# Altium PCB bh_carrier_0_alph.PcbDoc (part 1 of 2)
Units mil, origin at the board's own origin, x right, y up, seen from the top; angles counter-clockwise.
Board outline 3937.01 x 2362.2 mil, 2 copper layers (Top Layer, Bottom Layer); 124 components, 129 nets, 514 pads, 195 vias.
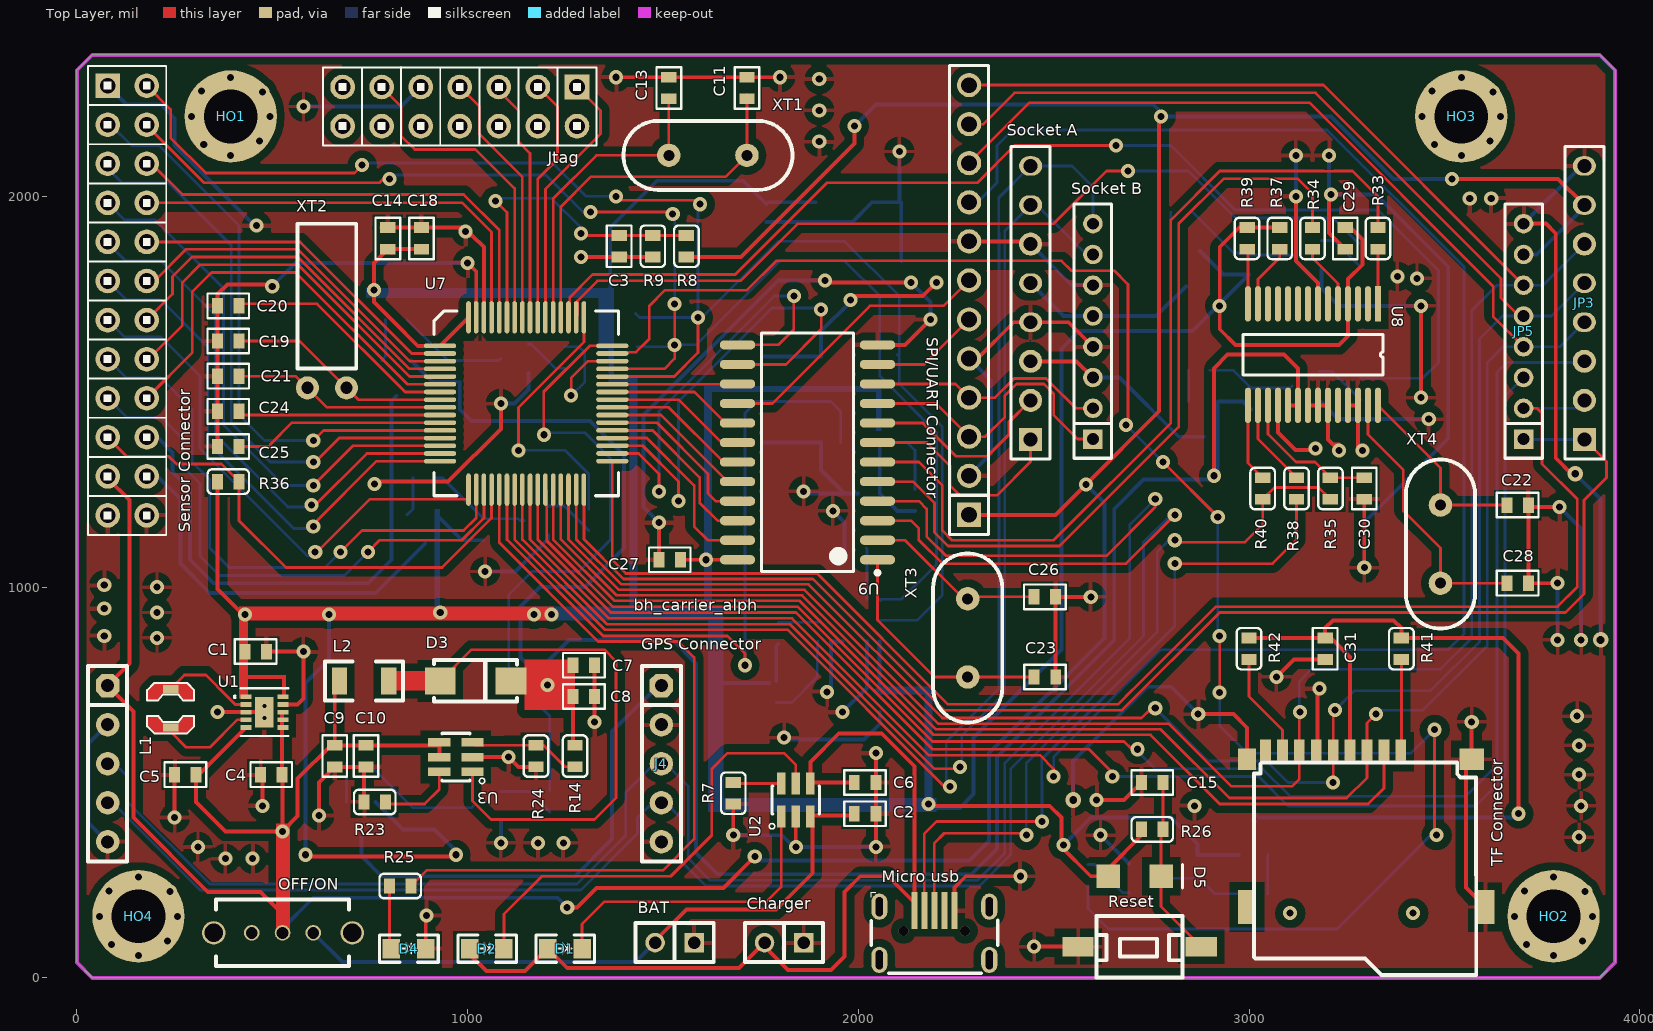
[diagram p0: Top Layer view]
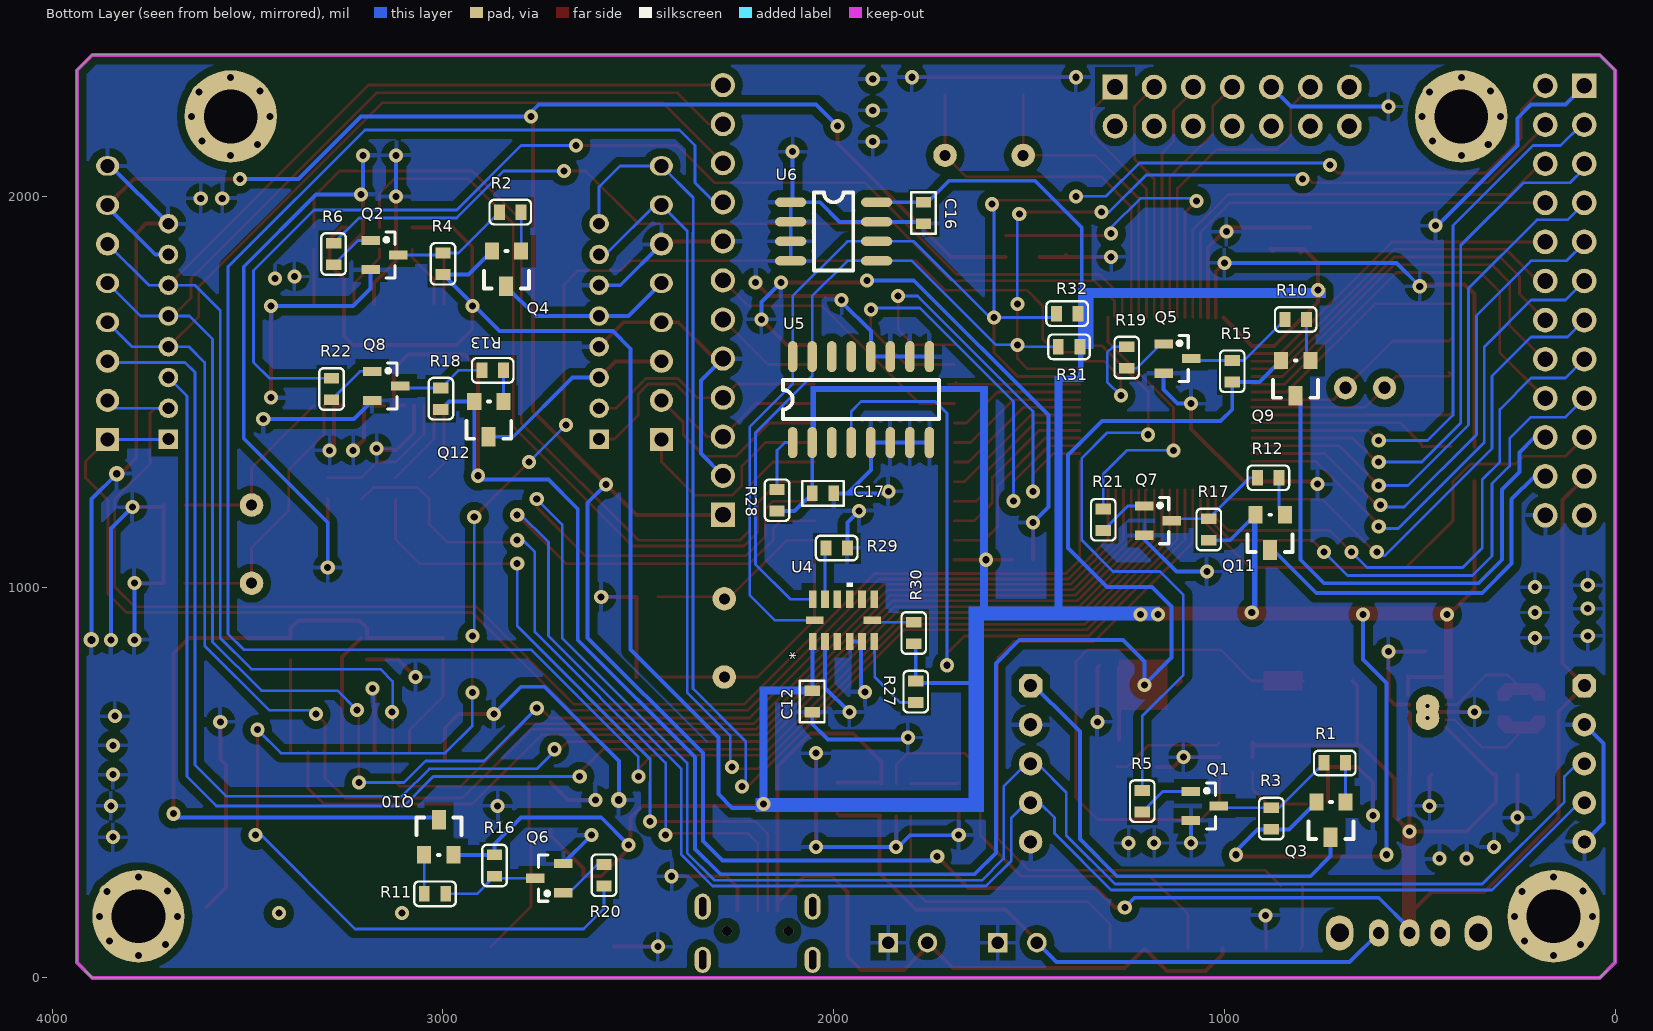
[diagram p1: Bottom Layer view, seen from below]

## Layer stack, top to bottom
Top Layer: signal copper 1.4
Dielectric: dielectric 12.6, FR-4, Dk 4.8
Bottom Layer: signal copper 1.4

## Board outline
0,2322.83 39.37,2362.2 3897.64,2362.2 3937.01,2322.83 3937.01,39.37 3897.64,0 39.37,0 0,39.37

## Design rules (kind name [scope] priority, off if disabled: settings)
Clearance Clearance_1 [(InPolygon)] p1: gap=20
Clearance [All] p2: gap=7
HoleSize [All] p1: absolutevalues=TRUE maxlimit=1000 minlimit=1 maxpercent=80.000 minpercent=20.000
MinimumSolderMaskSliver [All] p1 off: minsoldermaskwidth=10
PolygonConnect [All] p1: connectstyle=Relief reliefconductorwidth=10 reliefentries=4 polygonreliefangle="90 Angle"
RoutingVias [All] p1: holewidth=20 width=40 viastyle="Through Hole" minholewidth=15 minwidth=30 maxholewidth=20 maxwidth=40
ShortCircuit ShortCircuit_1 [HasFootPrint('HOLE1') OR  HasFootPrint('QFN-10') OR HasFootPrint('LPS3010')] p1: allowed=TRUE
ShortCircuit [All] p2: allowed=FALSE
SilkToSilkClearance [All] p1: silktosilkclearance=7
SilkscreenOverComponentPads [All] p1 off: minsilkscreentomaskgap=10
SolderMaskExpansion [All] p1: expansion=4
Width Width_2 [(OnLayer('Keep-Out Layer'))] p1: maxlimit=10 minlimit=10 preferedwidth=10
Width Width_1 [(InNet('VBUS') OR InNet('VCC_BASE_3.3V') OR InNet('VCC_BASE_5V') OR InNet('VCC_GPS_3.3V') OR InNet('VCC_SD_3.3V') OR InNet('VCC_SENSOR_3.3V') OR InNet('VCC_SENSOR_5V') OR InNet('VCC_SOCKET_3.3V') OR InNet('VCC_SOCKET_5V') OR InNet('VIN') OR InNet('V_BAT') OR InNet('GND') OR InNet('BAT'))] p2: maxlimit=10 minlimit=10 preferedwidth=10
Width [All] p3: maxlimit=7 minlimit=7 preferedwidth=7 minimp=50.000000 maximp=50.000000 favimp=50.000000
23 further rules are at their usual default settings.

## Components (designator, comment, footprint, x,y, rotation, side; value= is the part's Value field where it differs from the comment)
BAT "Battery Connector" SIP1X2X2.54 1580,90 r180 top (schematic designator J1)
C1 "10uf/6.3V" C0603 430,835 r0 top
C2 "10uF" C0603 2045,420 r180 top
C3 "0.1uf" C0603 1387.93,1900 r270 top
C4 "0.1uf" C0603 470,520 r0 top
C5 "4.7uf/6.3V" C0603 250,520 r0 top
C6 "1uF" C0603 2045,500 r180 top
C7 "22uF/16V" C0603 1270,800 r0 top
C8 "0.1uF" C0603 1270,720 r0 top
C9 "0.1uF" C0603 660,595 r270 top
C10 "10uF/6.3V" C0603 740,595 r270 top
C11 "22pf" C0603 1715,2305 r270 top
C12 "0.1uF" C0603 2055,735 r270 bottom
C13 "22pf" C0603 1515,2305 r270 top
C14 "0.1uf" C0603 795.83,1865 r90 top
C15 "0.1uf" C0603 2780,500 r180 top
C16 "0.1uF" C0603 1770,1985 r270 bottom
C17 "0.1uF" C0603 2055,1240 r180 bottom
C18 "0.1uf" C0603 881.87,1865 r90 top
C19 "22pf" C0603 360,1630 r0 top
C20 "0.1uf" C0603 360,1720 r0 top
C21 "22pf" C0603 360,1540 r0 top
C22 "22pf" C0603 3660,1210 r0 top
C23 "22pf" C0603 2450,770 r0 top
C24 "0.1uf" C0603 415.12,1449.99 r180 top
C25 "0.1uf" C0603 415.12,1359.99 r180 top
C26 "22pf" C0603 2505,975 r180 top
C27 "0.1uF" C0603 1490,1070 r0 top
C28 "22pf" C0603 3660,1010 r0 top
C29 "0.1uf" C0603 3246.26,1920.12 r270 top
C30 "0.1u" C0603 3295,1225 r90 top
C31 "0.1uf" C0603 3194.99,814.88 r90 top
Charger "Solar Connetcor" SIP1X2X2.54 1860,90 r180 top (schematic designator J2)
D1 "LED-RED" D0805 1205,75 r0 top
D2 "LED-GREEN" D0805 1005,75 r0 top
D3 "SM340A" DO-214 930,760 r0 top
D4 "LED-GREEN" D0805 805,75 r0 top
D5 "DIODE" D1206 2640,260 r0 top
"GPS Connector" "GPS_Socket-B" SIP1X5X2.54 78.74,748.03 r270 top locked (schematic designator J5)
HO1 "HOL" HOLE1 393.7,2204.72 r0 top locked
HO2 "HOL" HOLE1 3779.53,157.48 r0 top locked
HO3 "HOL" HOLE1 3543.31,2204.72 r0 top locked
HO4 "HOL" HOLE1 157.48,157.48 r0 top locked
J4 "GPS_Socket-A" SIP1X5X2.54 1496.06,748.03 r270 top locked
JP3 "Socket0-B" SIP1x8x2.54 3858.27,1377.95 r90 top locked
JP5 "Socket1B" SIP1x8x2.0 3700.79,1377.95 r90 top locked
Jtag "JTAG" SIP2X7X2.54 1280,2280 r180 top (schematic designator P2)
L1 "1.5uH" LPS3010 240,690 r270 top
L2 "INDUCTOR" L1206 735,760 r0 top
"Micro usb" "USB" MicroUSB_four 2105,180 r0 top (schematic designator P1)
OFF/ON "SD12D07VG3" SW-1-2 605,115 r270 top (schematic designator S1)
Q1 "9013" SOT-23 1050.24,439.76 r180 bottom
Q2 "9013" SOT-23 3150,1850 r180 bottom
Q3 "RTR020P02" TSMT3 690,450 r0 bottom
Q4 "RTR020P02" TSMT3 2800.24,1859.76 r0 bottom
Q5 "9013" SOT-23 1120,1585 r180 bottom
Q6 "9013" SOT-23 2728,255 r0 bottom
Q7 "9013" SOT-23 1170,1170 r180 bottom
Q8 "9013" SOT-23 3145.24,1514.76 r180 bottom
Q9 "RTR020P02" TSMT3 780.24,1579.76 r0 bottom
Q10 "RTR020P02" TSMT3 3048,315 r180 bottom
Q11 "RTR020P02" TSMT3 845.43,1185 r0 bottom
Q12 "RTR020P02" TSMT3 2845.24,1474.76 r0 bottom
R1 "10k" R0603 690,550 r0 bottom
R2 "10k" R0603 2800.24,1959.76 r0 bottom
R3 "100k" R0603 880,380 r90 bottom
R4 "100k" R0603 3000,1800 r90 bottom
R5 "1k" R0603 1210.24,479.76 r270 bottom
R6 "1k" R0603 3280,1880 r270 bottom
R7 "1.66k 1%" R0603 1680,445 r90 top
R8 "1M  1%" R0603 1560,1900 r270 top
R9 "1M 1%" R0603 1473.96,1900 r270 top
R10 "10k" R0603 790,1685 r0 bottom
R11 "10k" R0603 3048,215 r180 bottom
R12 "10k" R0603 860,1280 r0 bottom
R13 "10k" R0603 2845.24,1554.76 r0 bottom
R14 "110k" R0603 1275,540 r90 top
R15 "100k" R0603 980,1525 r90 bottom
R16 "100k" R0603 2868,315 r270 bottom
R17 "100k" R0603 1040,1120 r90 bottom
R18 "100k" R0603 3005.24,1454.76 r90 bottom
R19 "1k" R0603 1250,1615 r270 bottom
R20 "1k" R0603 2588,235 r90 bottom
R21 "1k" R0603 1310,1200 r270 bottom
R22 "1k" R0603 3285.24,1534.76 r270 bottom
R23 "18k" R0603 735,450 r0 top
R24 "15k" R0603 1175,540 r90 top
R25 "1k" R0603 800,235 r0 top
R26 "4.7k" R0603 2780,380 r180 top
R27 "0" R0603 1790,760 r270 bottom
R28 "10k" R0603 2145,1250 r270 bottom
R29 "0" R0603 2020,1100 r180 bottom
R30 "10k" R0603 1795,855 r90 bottom
R31 "10k" R0603 1425,1615 r180 bottom
R32 "10k" R0603 1430,1700 r180 bottom
R33 "100" R0603 3330,1865 r90 top
R34 "100" R0603 3162.5,1865 r90 top
R35 "2k" R0603 3208.33,1225 r90 top
R36 "4.7K" R0603 360,1270 r0 top
R37 "10k" R0603 3078.75,1865 r90 top
R38 "51" R0603 3121.66,1225 r90 top
R39 "10k" R0603 2995,1865 r90 top
R40 "51" R0603 3035,1225 r90 top
R41 "10k" R0603 3390,870 r270 top
R42 "10k" R0603 3000,870 r270 top
Reset "KEY" KEY_2Pin 2720,80 r0 top (schematic designator K1)
"Sensor Connector" "Sensor Connector" SIP2X12X2.54 78.74,2283.46 r270 top locked (schematic designator JP1)
"Socket A" "Socket0-A" SIP1x8x2.54 2440.94,1377.95 r90 top locked (schematic designator JP2)
"Socket B" "Socket1-A" SIP1x8x2.0 2598.43,1377.95 r90 top locked (schematic designator JP4)
"SPI/UART Connector" "SPI/UART Connector" SIP1x12x2.54 2283.46,1184.96 r90 top locked (schematic designator JP6)
"TF Connector" "microSD" TF_CARD 3300,380 r270 top locked (schematic designator SD1)
U1 "TPS63031" QFN-10 480,680 r0 top
U2 "TP4057" SOT23-6 1840,455 r180 top
U3 "FP6291" SOT23-6 970,565 r270 top
U4 "ADXL345" LGA-CC-14-1 1975,915 r90 bottom
U5 "DS3231S" SO-16 2105,1370 r90 bottom
U6 "AT24C16" SO-8 2110,1985 r180 bottom
U7 "MSP430F149" LQFP64_M 1150,1470 r0 top
U8 "PL2303" SOP28 3380,2350 r270 top
U9 "GM8125-SSO" SOP-24 1870,1345 r180 top
XT1 "8M" HC-49S 1715,2105 r180 top
XT2 "32.768K" AT308 590,1510 r270 top
XT3 "12M" HC-49S 2280,970 r270 top
XT4 "12MHz" HC-49S 3490,1010 r90 top

## Footprints (in the part's own frame and the unit in brackets; to place one, negate y for a bottom-side part, rotate by r counter-clockwise, add the part's x,y. Pads: shape width x height; smd on the part's side, far side on the other; paste and mask are expansions set on the pad)
AT308 [mm] "XT32748"
  round 1.5 hole 0.8: 1(0,0) 2(0,2.54)
  silkscreen extent -10.67,-0.64 -1.27,3.17, body extent -10.19,-0.55 0.59,2.9, height 3.12
C0603 [mm]
  rect 0.7x1 smd: 1(0,0) 2(1.4,0)
  silkscreen extent -0.65,-0.8 2.05,0.8, body extent -0.09,-0.38 1.51,0.42, height 0.3
D0805 [mil]
  rect 45x50 smd: A(0,0) K(88,0)
  silkscreen extent -30,-35 120,35, body extent 7,-20 88,16, height 33
D1206 [mil]
  rect 60x60 smd: 1(135,0) 2(0,0)
  silkscreen extent 190,-30 190,30
DO-214 [mm]
  rect 2x1.75 smd: 1(0,0) 2(4.6,0)
  silkscreen extent -0.4,-1.35 5,1.35, body extent -0.2,-1.34 4.91,1.33, height 2.12
HC-49S [mil]
  round 60 hole 28: 1(0,0) 2(200,0)
  silkscreen extent -116,-88 316,89, body extent -123,-92 329,92, height 138
HOLE1 [mm]
  round 6 hole 3.5: 0(0,0)
KEY_2Pin [mil]
  rect 80x50 smd: 1(-157.48,0) 2(157.48,0)
  silkscreen extent -110,-79 110,79
L1206 [mm] "Chip Resistor, 2-Leads, Body 3.2x1.6mm, IPC Medium Density"
  rect 1x1.75 smd: 1(-1.6,0) 2(1.6,0)
  silkscreen extent -2.54,-1.27 2.54,1.27, body extent -1.65,-0.8 1.65,0.8, height 0.6
LGA-CC-14-1 [mm]
  rect 1.118x0.5 smd mask+0.025: 1(-1.371,2) 2(-1.371,1.2) 3(-1.371,0.4) 4(-1.371,-0.4) 5(-1.371,-1.2) 6(-1.371,-2) 8(1.371,-2) 9(1.371,-1.2) 10(1.371,-0.4) 11(1.371,0.4) 12(1.371,1.2) 13(1.371,2)
  rect 0.5x1.118 smd mask+0.025: 7(0,-1.871) 14(0,1.871)
  silkscreen extent 2.18,-0.59 2.44,-0.21
LPS3010 [mm]
  rect 0.5x1 smd mask+0: 1(-1.255,0.002) 2(1.255,-0.002)
  Top Layer region: 1.179,-1.526 0.493,-1.526 0.493,-0.84 0.874,-0.535 0.874,0.531 0.493,0.836 0.493,1.522 1.179,1.522 1.636,1.065 1.636,-1.069
  Top Layer region: -1.179,1.526 -0.493,1.526 -0.493,0.84 -0.874,0.535 -0.874,-0.531 -0.493,-0.836 -0.493,-1.522 -1.179,-1.522 -1.636,-1.065 -1.636,1.069
  silkscreen extent -1.64,-1.53 1.64,1.53, body extent -1.59,-1.61 1.56,1.55, height 1
LQFP64_M [mm] "作者：王千会"
  oval 2.1x0.3 smd: 1(-5.6,3.75) 2(-5.6,3.25) 3(-5.6,2.75) 4(-5.6,2.25) 5(-5.6,1.75) 6(-5.6,1.25) 7(-5.6,0.75) 8(-5.6,0.25) 9(-5.6,-0.25) 10(-5.6,-0.75) 11(-5.6,-1.25) 12(-5.6,-1.75) 13(-5.6,-2.25) 14(-5.6,-2.75) 15(-5.6,-3.25) 16(-5.6,-3.75) 33(5.6,-3.75) 34(5.6,-3.25) 35(5.6,-2.75) 36(5.6,-2.25) 37(5.6,-1.75) 38(5.6,-1.25) 39(5.6,-0.75) 40(5.6,-0.25) 41(5.6,0.25) 42(5.6,0.75) 43(5.6,1.25) 44(5.6,1.75) 45(5.6,2.25) 46(5.6,2.75) 47(5.6,3.25) 48(5.6,3.75)
  oval 0.3x2.1 smd: 17(-3.75,-5.6) 18(-3.25,-5.6) 19(-2.75,-5.6) 20(-2.25,-5.6) 21(-1.75,-5.6) 22(-1.25,-5.6) 23(-0.75,-5.6) 24(-0.25,-5.6) 25(0.25,-5.6) 26(0.75,-5.6) 27(1.25,-5.6) 28(1.75,-5.6) 29(2.25,-5.6) 30(2.75,-5.6) 31(3.25,-5.6) 32(3.75,-5.6) 49(3.75,5.6) 50(3.25,5.6) 51(2.75,5.6) 52(2.25,5.6) 53(1.75,5.6) 54(1.25,5.6) 55(0.75,5.6) 56(0.25,5.6) 57(-0.25,5.6) 58(-0.75,5.6) 59(-1.25,5.6) 60(-1.75,5.6) 61(-2.25,5.6) 62(-2.75,5.6) 63(-3.25,5.6) 64(-3.75,5.6)
  silkscreen extent -6,-6 6,6, body extent -6.07,-6.07 6.07,6.07, height 1.63
MicroUSB_four [mm]
  rect 0.4x2.4 smd: 1(0.976,-0.2) 2(1.626,-0.2) 3(2.276,-0.2) 4(3.576,-0.2) NC(2.926,-0.2)
  oval 1.05x1.7 hole 0.45 slot 1.25 at 90 deg: ""(-1.299,-3.4) ""(-1.299,0.05) ""(5.851,-3.4) ""(5.851,0.05)
  round 0.65 hole 0.65: ""(0.276,-1.525) ""(4.276,-1.525)
  silkscreen extent -1.82,-4.28 6.4,0.99, body extent -1.82,-4.94 6.38,0.99, height 2.69
QFN-10 [mm] "DSK10_2X1P2T"
  rect 0.704x0.3 smd paste-0.15: 1(-1.202,1) 2(-1.202,0.5) 3(-1.202,0) 4(-1.202,-0.5) 5(-1.202,-1) 6(1.202,-1) 7(1.202,-0.5) 8(1.202,0) 9(1.202,0.5) 10(1.202,1)
  rect 1.2x2 smd paste-0.987 mask-0.987: 11(0,0)
  round 0.508 / inner round 1.524 / far side round 1.524 hole 0.254: V(0,-0.394) V_2(0,0.394)
  Top Layer region: 0,-1 0,-1 0,-1 0,-1 0,-1 0,-1 0,-1 0,-1
  Top Layer region: 0,1 0,1 0,1 0,1 0,1 0,1 0,1 0,1
  silkscreen extent -1.98,-1.55 1.55,1.55
R0603 [mm]
  rect 0.7x1 smd: 1(0,0) 2(1.4,0)
  silkscreen extent -0.65,-0.8 2.05,0.8, body extent -0.1,-0.4 1.5,0.4, height 0.3
SIP1X2X2.54 [mil]
  rect 50x50 hole 32: 1(0,0)
  round 50 hole 32: 2(100,0)
  silkscreen extent -50,-50 150,50, body extent -52,-52 148,48, height 340
SIP1X5X2.54 [mil]
  oct 60x60 hole 33: 1(0,0)
  round 60 hole 33: 2(100,0) 3(200,0) 4(300,0) 5(400,0)
  silkscreen extent -50,-50 450,50
SIP1x8x2.0 [mil]
  rect 50x50 hole 30: 1(1,-2)
  round 50 hole 30: 2(79.74,-2) 3(158.48,-2) 4(237.22,-2) 5(315.96,-2) 6(394.7,-2) 7(473.44,-2) 8(552.18,-2)
  silkscreen extent -48,-50 602,46
SIP1x8x2.54 [mm] "Connector; Header; 8 Position"
  rect 1.5x1.5 hole 0.9: 1(0,0)
  round 1.5 hole 0.9: 2(2.54,0) 3(5.08,0) 6(12.7,0)
  oval 1.27x1.5 hole 0.9: 4(7.62,0) 5(10.16,0) 7(15.24,0) 8(17.78,0)
  silkscreen extent -1.27,-1.27 19.05,1.27, body extent -1.27,-1.27 19.05,1.27, height 0.7
SIP1x12x2.54 [mil]
  rect 62x62 hole 40: 1(0,0)
  round 62 hole 40: 2(100,0) 3(200,0) 4(300,0) 5(400,0) 6(500,0) 7(600,0) 8(700,0) 9(800,0) 10(900,0) 11(1000,0) 12(1100,0)
  silkscreen extent -50,-50 1150,50
SIP2X7X2.54 [mil]
  rect 63x63 hole 40: 1(0,0)
  round 63 hole 40: 2(0,100) 3(100,0) 4(100,100) 5(200,0) 6(200,100) 7(300,0) 8(300,100) 9(400,0) 10(400,100) 11(500,0) 12(500,100) 13(600,0) 14(600,100)
  silkscreen extent -50,-51 650,150, body extent -51,-52 648,150, height 340
SIP2X12X2.54 [mil]
  rect 63x63 hole 40: 1(0,0)
  round 63 hole 40: 2(0,100) 3(100,0) 4(100,100) 5(200,0) 6(200,100) 7(300,0) 8(300,100) 9(400,0) 10(400,100) 11(500,0) 12(500,100) 13(600,0) 14(600,100) 15(700,0) 16(700,100) 17(800,0) 18(800,100) 19(900,0) 20(900,100) 21(1000,0) 22(1000,100) 23(1100,0) 24(1100,100)
  silkscreen extent -50,-50 1150,150, body extent -51,-52 1148,150, height 340
SO-8 [mil]
  oval 80x24 smd: 1(0,0) 2(0,-50) 3(0,-100) 4(0,-150) 5(220,-150) 6(220,-100) 7(220,-50) 8(220,0)
  silkscreen extent 60,-175 160,25, body extent -9,-171 229,21, height 67
SO-16 [mil]
  oval 80x24 smd: 1(0,0) 2(0,-50) 3(0,-100) 4(0,-150) 5(0,-200) 6(0,-250) 7(0,-300) 8(0,-350) 9(220,-350) 10(220,-300) 11(220,-250) 12(220,-200) 13(220,-150) 14(220,-100) 15(220,-50) 16(220,0)
  silkscreen extent 60,-375 160,25, body extent -4,-368 224,18, height 69
SOP28 [mm] "PL2303"
  rect 2.3x0.38 smd: 1(15.875,-1.27)
  oval 2.3x0.38 smd: 2(15.875,-1.92) 3(15.875,-2.57) 4(15.875,-3.22) 5(15.875,-3.87) 6(15.875,-4.52) 7(15.875,-5.17) 8(15.875,-5.82) 9(15.875,-6.47) 10(15.875,-7.12) 11(15.875,-7.77) 12(15.875,-8.42) 13(15.875,-9.07) 14(15.875,-9.72) 15(22.475,-9.72) 16(22.475,-9.07) 17(22.475,-8.42) 18(22.475,-7.77) 19(22.475,-7.12) 20(22.475,-6.47) 21(22.475,-5.82) 22(22.475,-5.17) 23(22.475,-4.52) 24(22.475,-3.87) 25(22.475,-3.22) 26(22.475,-2.57) 27(22.475,-1.92) 28(22.475,-1.27)
  silkscreen extent 17.86,-10.05 20.49,-0.95, body extent 17.86,-10.05 20.49,-0.94, height 0.08
SOP-24 [mm] "SOP, 24-Leads, Body 15.5x7.6mm (max), Pitch 1.27mm, IPC Medium Density"
  oval 2.3x0.6 smd: 1(-4.55,6.985) 2(-4.55,5.715) 3(-4.55,4.445) 4(-4.55,3.175) 5(-4.55,1.905) 6(-4.55,0.635) 7(-4.55,-0.635) 8(-4.55,-1.905) 9(-4.55,-3.175) 10(-4.55,-4.445) 11(-4.55,-5.715) 12(-4.55,-6.985) 13(4.55,-6.985) 14(4.55,-5.715) 15(4.55,-4.445) 16(4.55,-3.175) 17(4.55,-1.905) 18(4.55,-0.635) 19(4.55,0.635) 20(4.55,1.905) 21(4.55,3.175) 22(4.55,4.445) 23(4.55,5.715) 24(4.55,6.985)
  silkscreen extent -4.68,-7.75 3,7.96, body extent -3.8,-7.75 3.8,7.75, height 2.65
SOT23-6 [mm] "SOT-23/SC-74A; 5 Leads; Body 3.1 x 3 mm, inc. leads (LxW max)"
  rect 0.55x1.45 smd: 1(0.95,1.075) 2(0,1.075) 3(-0.95,1.075) 4(-0.95,-1.075) 5(0,-1.075) 6(0.95,-1.075)
  silkscreen extent -1.55,-0.9 1.72,1.88, body extent -1.4,-1.19 1.4,1.23, height 1.08
SOT-23 [mm] "SOT23, 3-Leads, Body 2.9x1.3mm, Pitch 0.95mm, Lead Span 2.5mm, IPC High Density"
  rect 1.2x0.6 smd: 1(-0.9,0.95) 2(-0.9,-0.95) 3(0.9,0)
  silkscreen extent 0,-1.5 0.7,1.5, body extent -0.7,-1.5 0.7,1.5, height 1.1
SW-1-2 [mil]
  round 60 / inner round 60 / far side oval 90x70 hole 47.24: 0(0,100) 0(0,-255)
  round 40 / inner round 40 / far side oval 70x50 hole 30.62: 1(0,0) 2(0,-78.74) 3(0,-157.48)
  silkscreen extent -85,-249 85,91
TF_CARD [mm]
  rect 2.2x1.2 smd: 0(5.05,-7.75) 11(5.05,7.75)
  rect 1.6x0.7 smd: 1(-5.05,2.25) 2(-5.05,1.15) 3(-5.05,0.05) 4(-5.05,-1.05) 5(-5.05,-2.15) 6(-5.05,-3.25) 7(-5.05,-4.35) 8(-5.05,-5.45) 9(-5.05,-6.55)
  rect 1.4x1.2 smd: 10(-4.55,-7.75)
  rect 1.4x1.6 smd: 12(-4.55,6.85)
  silkscreen extent -4.35,-7.29 9.47,7.15
TSMT3 [mil]
  rect 36x44 smd: 1(-0.24,-0.24) 2(74.76,-0.24)
  rect 36x50 smd: 3(38,90)
  silkscreen extent -20,0 95,95, body extent -24,15 99,69, height 43

## Part data
BAT Charger: library part SIP1X2, "Connector"
C1 C2 C3 C4 C5 C6 C7 C8 C9 C10 C11 C12 C13 C14 C15 C16 C17 C18 C19 C20 C21 C22 C23 C24 C25 C26 C27 C28 C29 C30 C31: library part CAP-SMD, "SMD-CAP"
D1 D2 D4: library part LED
D3: library part "DIODE SCHOTTKY", "Schottky Diode"
D5: "Diode"
"GPS Connector" J4: library part SIP1X5, "Connector"
HO1 HO2 HO3 HO4: library part Antenna, "Generic Antenna"
JP3 JP5 "Socket A" "Socket B": library part SIP1X8, "8 Pin Header"
Jtag: library part "Header 7X2", "Header, 7-Pin, Dual row"
L1: library part L1, "LPS3015-152"
L2: "Inductor"
OFF/ON: library part SW-SPDT
Q1 Q2 Q5 Q6 Q7 Q8: library part NPN, "NPN Transistor"
Q3 Q4 Q9 Q10 Q11 Q12: library part "MOSFET P"
R1 R2 R3 R4 R5 R6 R7 R8 R9 R10 R11 R12 R13 R14 R15 R16 R17 R18 R19 R20 R21 R22 R23 R24 R25 R26 R27 R28 R29 R30 R31 R32 R33 R34 R35 R36 R37 R38 R39 R40 R41 R42: library part RES, "Resistor"
"Sensor Connector": library part SIP2X12
"SPI/UART Connector": library part SIP1X12, "12 Pin Header"
U1: library part TPS63031_2
U2: library part PT4057
U5: library part DS3231
U9: library part GM8125
XT1 XT2 XT3 XT4: library part XT, "晶振"

## Via types
v1: diameter 36, hole 18, Top Layer to Bottom Layer, 192 vias
v2: diameter 40, hole 20, Top Layer to Bottom Layer, 3 vias

## Nets (pads, with @x,y where several pads share a name; then routed paths per layer and width w, separated by ;. In a path a pad name is that pad's centre, name@x,y a point inside that pad or via, vN(x,y) a via of type N, cw(c..) or ccw(c..) an arc to the next point about the centre after c; other vN are vias at no path point)
AD0: C3.1 R8.1 R9.1 U7.59 | length 887.9
  Top Layer w7: v1(1071.75,1988.25) 1100.79,1959.21 U7.59@1100.79,1690.47 ; v1(1290,1905) 1295,1900 1447.93,1900 ; C3.1@1387.93,1900 R9.1@1473.96,1900 R8.1@1560,1900
  Bottom Layer w7: v1@1075,1995 1215,1995 v1@1290,1920
AD1: "Sensor Connector.6" U7.60 | length 1196
  Top Layer w7: 178.74,2083.46 191.54,2083.46 270,2005 990,2005 1081.1,1913.9 U7.60@1081.1,1690.47
AD2: "Sensor Connector.8" U7.61 | length 1131.8
  Top Layer w7: 178.74,1983.46 986.54,1983.46 1061.42,1908.58 U7.61@1061.42,1690.47
AD3: "Sensor Connector.10" U7.2 | length 869.1
  Top Layer w7: 178.74,1883.46 571.54,1883.46 857.05,1597.95 U7.2@929.53,1597.95
AD4: "Sensor Connector.12" U7.3 | length 903.3
  Top Layer w7: 178.74,1783.46 198.46,1783.46 280,1865 565,1865 851.73,1578.27 U7.3@929.53,1578.27
AD5: "Sensor Connector.14" U7.4 | length 962.9
  Top Layer w7: 178.74,1683.46 245,1749.72 245,1795 295,1845 565.2,1845 851.62,1558.58 U7.4@929.53,1558.58
AD6: "Sensor Connector.16" U7.5 | length 1059.1
  Top Layer w7: 178.74,1608.74 178.74,1583.46 183.46,1583.46 270,1670 270,1780 315,1825 565.4,1825 851.5,1538.9 U7.5@929.53,1538.9
AD7: "Sensor Connector.18" U7.6 | length 1093.3
  Top Layer w7: 178.74,1483.46 295,1599.72 295,1755 345,1805 560,1805 845.79,1519.21 U7.6@929.53,1519.21
BAT: BAT.2 C2.2 OFF/ON.1 U2.3 | length 1679.3
  Top Layer w10: BAT.2@1480,105 1480,95 1560,175 1790,175 1882.6,267.6 1882.6,370 ; 1882.6,362.4 1882.6,370 ; C2.2@1989.88,420 1984.88,415 1879.72,415 1882.6,412.13 1882.6,370
  Bottom Layer w10: OFF/ON.1@605,115 680,40 1430,40 BAT.2@1480,90
DATA+: "Micro usb.3" R35.1 R40.1 | length 1859.7
  Top Layer w7: 2194.59,172.13 2194.59,344.59 2220,370 2420,370 v1@2430,360 ; v1(2810,1120) 2815,1115 2990,1115 3035,1160 R40.1@3035,1225 3065,1255 3178.33,1255 R35.1@3208.33,1225
  Bottom Layer w7: v1@2430,350 2430,550 2765,885 2765,1090 v1@2800,1125
  other v1: 2430,365
DATA-: "Micro usb.2" R38.1 | length 1751.8
  Top Layer w7: 2169,172.13 2169,369 2200,400 v1(2470,400) ; v1(2810,1060) 3060,1060 3121.66,1121.66 R38.1@3121.66,1225
  Bottom Layer w7: 2469.5,501.87 2469.5,559.5 2810,900 v1(2810,1060) ; v1(2470,400) 2470,501.37
EX_RXD1: "GPS Connector.3" J4.3 U9.4 | length 4913.8
  Top Layer w7: U9.4@2049.13,1220 2155,1220 2175,1200 2175,1130 2225,1080 2635,1080 2760,1205 v1(2760,1225)
  Bottom Layer w7: 78.74,555 90,555 130,515 130,450 340,240 510,240 ; 500,240 510,240 ; J4.3@1496.06,548.03 1478.03,548.03 1405,475 1405,365 1280,240 510,240 ; J4.3@1496.06,571.06 1483.94,571.06 1565,490 1565,305 1620.5,249.5 2304.5,249.5 2375,320 2375,550 2695,870 2695,1160 2750,1215 2760,1215 v1(2760,1225)
EX_RXD2: "Socket B.2" "SPI/UART Connector.4" U9.10 | length 617.7
  Top Layer w7: U9.10@2049.13,1520 2248.43,1520 2283.46,1484.96 2350.17,1484.96 2399.2,1534 2480.8,1534 2492.4,1522.4 2557.11,1457.69 2600.43,1457.69
EX_RXD3: R33.2 U9.6 | length 2234.3
  Top Layer w7: U9.6@2049.13,1320 2155,1320 2215,1260 2215,1145 2240,1120 2500,1120 2800,1420 2800,1940 2925,2065 3191.87,2065 3192.37,2064.5 3217.63,2064.5 3218.13,2065 3265,2065 3330,2000 R33.2@3330,1920.12
EX_RXD4: "Socket A.2" U9.8 | length 505
  Top Layer w7: U9.8@2049.13,1420 2165,1420 2250,1335 2330,1335 2385,1390 2385,1422.01 2440.95,1477.95
EX_RXD5: "SPI/UART Connector.7" U9.16 | length 723.1
  Top Layer w7: U9.16@1690.87,1470 1780,1470 2030,1720 2218.5,1720 2283.46,1784.96
EX_SPI_CS: "SPI/UART Connector.9" U7.25 | length 5445.2
  Top Layer w7: U7.25@1159.84,1249.53 1159.84,1121.77 1361.61,920 1830,920 2180,570 2465,570 2500,535 v1(2500,515)
  Bottom Layer w7: 2283.46,1984.96 2304.96,1984.96 2355,2035 2355,2130 2395,2170 3200,2170 3550,1820 3550,880 3510,840 2775,840 2500,565 v1(2500,515)
EX_TXD1: "GPS Connector.4" J4.4 U9.3 | length 4638.4
  Top Layer w7: U9.3@2049.13,1170 2135,1170 2155,1150 2155,1120 2215,1060 2685,1060 v1(2810,1185)
  Bottom Layer w7: 78.74,450 90,450 315,225 1290,225 1435,370 1435,410 1473.03,448.03 J4.4@1496.06,448.03 ; J4.4@1496.06,458.94 J4.4@1508.94,458.94 ; J4.4@1501.52,453.48 1545.5,409.5 1545.5,299.5 1610,235 2310,235 2390,315 2390,535 2730,875 2730,1115 v1@2805,1190
EX_TXD2: "Socket B.1" "SPI/UART Connector.3" U9.9 | length 765.3
  Top Layer w7: U9.9@2049.13,1470 2198.43,1470 2283.46,1384.96 2324.96,1384.96 2375,1435 2375,1490 2405,1520 2475,1520 2500,1495 2500,1440 2561.05,1378.95 2600.43,1378.95
EX_TXD3: R34.2 U9.5 | length 2022.5
  Top Layer w7: U9.5@2049.13,1270 2140,1270 2195,1215 2195,1140 2230,1105 2515,1105 2820,1410 2820,1930 2935,2045 3125,2045 3162.5,2007.5 R34.2@3162.5,1920.12
EX_TXD4: "Socket A.1" U9.7 | length 569.6
  Top Layer w7: U9.7@2049.13,1370 2175,1370 2235,1310 2235,1260 2260,1235 2355,1235 2440.95,1320.95 2440.95,1377.95
EX_TXD5: "SPI/UART Connector.6" U9.11 | length 282
  Top Layer w7: U9.11@2049.13,1570 2168.5,1570 2283.46,1684.96
GM8125_MS: U7.36 U9.23 | length 490.2
  Top Layer w7: U7.36@1370.47,1381.42 1458.58,1381.42 1580,1260 1580,1155 1615,1120 U9.23@1690.87,1120
GM8125_RST: U7.43 U9.15 | length 342.1
  Top Layer w7: U7.43@1370.47,1519.21 U9.15@1706.65,1519.21 ; U9.15@1686.65,1524.21 U9.15@1690.87,1520
GND: "GPS Connector.2" "GPS Connector.5" "Micro usb.4" "Sensor Connector.1" "Sensor Connector.23" "Sensor Connector.24" "Socket A.4" "Socket A.6" "Socket B.4" "Socket B.6" "SPI/UART Connector.2" "SPI/UART Connector.5" "SPI/UART Connector.8" "TF Connector.6" "TF Connector.10" "TF Connector.11" "TF Connector.12" BAT.1 C1.2 C2.1 C3.2 C4.1 C5.1 C6.1 C7.2 C8.2 C9.2 C10.2 C11.1 C12.2 C13.1 C14.2 C15.2 C16.2 C17.2 C18.2 C19.1 C20.1 C21.1 C22.2 C23.2 C24.2 C25.2 C26.1 C27.1 C28.2 C29.2 C30.1 C31.1 Charger.1 D4.K J4.2 J4.5 JP3.8 JP5.8 Jtag.9 Q1.2 Q2.2 Q5.2 Q6.2 Q7.2 Q8.2 R7.1 R9.2 R23.1 R24.1 R29.2 Reset.1 U1.3 U1.9 U1.11 U2.2 U3.2 U4.2 U4.4 U4.5 U5.5 U5.6 U5.7 U5.8 U5.9 U5.10 U5.11 U5.12 U6.1 U6.2 U6.3 U6.4 U6.7 U7.62 U7.63 U8.7 U8.18 U8.21 U8.22 U8.23 U8.25 U8.26 U9.12 | length 19843.7
  Top Layer w10: v1(250,410) C5.1@250,520 ; v1(360,680) U1.3@432.68,680 U1.11@464.39,680 ; C25.2@360,1359.99 C24.2@360,1449.99 C21.1@360,1540 C19.1@360,1630 C20.1@360,1720 360,1750 385,1775 495,1775 v1(500,1770) ; C4.1@470,520 475,515 v1(475,440) ; C1.2@485.12,835 560,835 ; U1.9@527.32,699.68 564.68,699.68 580,715 v1(580,835) ; v1(620,415) 610,415 615.06,420 v1@620,424.88 ; v1@620,425 620,499.88 C9.2@660,539.88 C10.2@740,539.88 735,534.88 R23.1@735,450 ; v1(761.57,1263.43) 760,1265 760,1270 950,1270 1085,1405 v1(1085,1470) ; C14.2@780.12,1920.12 C14.2@795.83,1920.12 C18.2@881.87,1920.12 984.88,1920.12 990,1915 990,1900 1011.73,1900 1041.73,1870 U7.62@1041.73,1690.47 ; Jtag.9@880,2280 Jtag.9@885,2280 ; D4.K@893,75 893,158 v1(895,160) ; v1(1000,1830) 1022.05,1807.95 U7.63@1022.05,1690.47 ; U3.2@1012.32,565 v1(1105,565) ; v1@1105,560 v1(1105,565) ; R24.1@1175,540 1130,540 v1(1105,565) ; v1(1290,1845) R9.2@1460,1845 ; C7.2@1320.12,800 1325.12,795 C8.2@1325.12,720 1325.12,655.12 v1(1325,655) ; v1(1380,2305) C13.1@1515,2305 C11.1@1715,2305 v1(1800,2305) v1@1800,2295 ; C3.2@1387.93,1844.88 R9.2@1473.96,1844.88 ; C3.2@1400,1845 C3.2@1405,1850 ; C27.1@1490,1070 v1(1490,1165) ; v1(1680,365) R7.1@1680,445 R7.1@1680,435 ; v1@1840,345 U2.2@1840,412.68 ; v1(1915,1785) 1920,1780 v1(2135,1780) ; v1(1980,1735) 1990,1745 2165,1745 v1(2200,1780) ; v1(2045,335) C2.1@2045,420 C6.1@2045,500 v1(2045,575) ; U9.12@2049.13,1620 2120,1620 v1(2185,1685) ; 2245.77,172.13 2245.77,230.77 2275,260 v1(2415,260) ; 2283.46,1584.96 2304.96,1584.96 2397.95,1677.95 2537.65,1677.95 2600.43,1615.17 ; 2283.46,1884.96 2433.93,1884.96 2440.95,1877.95 ; v1(2450,80) Reset.1@2562.52,80 ; C23.2@2505.12,770 2505.12,974.88 C26.1@2505,975 v1(2595,975) ; v1@2605,455 2679.88,455 C15.2@2724.88,500 ; v1(2870,675) 2960,675 2994.88,640.12 2994.88,559.13 ; v1(3070,770) 3114.88,814.88 C31.1@3194.99,814.88 ; U8.18@3074.09,1465.16 3074.09,1395.91 3118.82,1351.18 3168.82,1351.18 v1@3170,1352.36 ; v1(3120,2000) 3120,1835 3176.46,1778.54 U8.7@3176.46,1725 ; U8.21@3150.87,1465.16 U8.22@3176.46,1465.16 U8.23@3202.05,1465.16 3202.05,1377.95 3215,1365 3230,1365 v1(3230,1350) ; v1@3170,1350 v1@3170,1352.36 ; v1(3170,1355) v1@3170,1352.36 ; 3172.05,578.82 3175,581.77 3175,735 v1(3180,740) ; v1(3210,2005) 3205,2010 3205,1906.26 C29.2@3246.26,1865 ; U8.25@3253.23,1465.16 U8.26@3278.82,1465.16 3278.82,1351.18 3280,1350 v1(3290,1350) ; v1(3295,1050) C30.1@3295,1225 ; v1(3440,1485) v1(3440,1720) ; v1(3570,655) 3569.69,654.68 3569.69,559.13 3555,544.45 3555,231.3 3605.12,181.18 ; JP5.8@3710.45,1930.13 JP5.8@3702.79,1930.13 3759.87,1930.13 3785,1905 3785,1330 3825,1290 v2(3835,1290) ; v1(3790,1010) C28.2@3715.12,1010 C22.2@3715.12,1210 3720.12,1205 v1(3795,1205)
  Bottom Layer w10: 70,1174.72 78.74,1183.46 ; 78.74,348.03 30,396.77 30,600 78.03,648.03 78.74,648.03 ; 78.74,2283.46 127.2,2235 215,2235 250,2200 250,2130 460,1920 v1(460,1925) ; v1(500,1770) 560,1830 v1(1000,1830) ; v1(580,2230) 830,2230 Jtag.9@880,2280 ; v1(1045,1040) 1122.83,1040 1205.43,1122.6 Q7.2@1205.43,1132.6 ; v1(1085,345) 1085.67,345.67 Q1.2@1085.67,402.36 ; v1(1085,1470) 1120,1470 1155.43,1505.43 Q5.2@1155.43,1547.6 ; v1(1490,1165) 1450,1205 1450,1440 1795,1785 v1(1915,1785) ; v1(1680,365) 1690,375 1700,365 1805,365 1840,330 v1(1840,335) ; U5.8@1755,1370 U5.7@1805,1370 U5.6@1855,1370 U5.5@1905,1370 1905,1300 1965,1240 C17.2@1999.88,1240 1865,1240 v1(1860,1245) ; U5.9@1755,1590 U5.10@1805,1590 U5.11@1855,1590 U5.12@1905,1590 1905,1655 1980,1730 v1(1980,1735) ; C16.2@1765,1935 U6.7@1890,1935 1985,1935 2035,1985 U6.1@2110,1985 ; v1@1820,625 1820,610 2015,610 2055,650 C12.2@2055,679.88 ; v1@1850,335 v1@2035,335 ; v1@1910,722.24 1930,742.24 1930,861.03 U4.4@1959.25,861.03 ; v1(1935,1195) 1945,1195 1945,1185 1965,1165 1964.88,1164.88 R29.2@1964.88,1100 ; v1(1960,680) 2022.24,742.24 U4.2@2022.24,861.03 ; v1(2105,2115) 2105,1990 U6.1@2110,1985 ; U6.4@2110,1835 U6.3@2110,1885 U6.2@2110,1935 U6.1@2110,1985 ; v1(2135,1780) 2185,1730 v1(2185,1685) ; 2283.46,1284.96 2340,1341.5 2340,1528.43 2283.46,1584.96 ; 2440.95,1877.95 2546.24,1772.65 2600.43,1772.65 ; v2(2550,455) 2550,555 2650,655 2740,745 2800,745 v1(2870,675) ; v1(2620,365) Q6.2@2692.57,292.4 ; v1@3120,1995 v1(3120,2105) ; Q8.2@3180.67,1477.36 3228.03,1430 v1(3460,1430) ; Q2.2@3185.43,1812.6 3185.43,1764.57 3230,1720 v1(3440,1720) ; v1(3205,2105) 3205,2010 v1(3210,2005) 3325,2005 3510,1820 3510,1380 3295,1165 v1(3295,1050) ; JP5.8@3702.79,1930.13 3850.61,2077.95 JP3.8@3858.27,2077.95 ; v1(3790,865) v1(3790,1010) ; v1(3795,1205) 3850,1150 3850,875 3860,865 v1(3850,865) ; v2(3835,1290) 3900,1225 3900,855 3905,860 v2(3900,865)
  other v1: 380,305 450,305 310,335 1180,345 1245,345 3845,360 2860,440 3850,440 2610,455 3845,520 3845,595 1810,615 3840,670 1919.83,732.08 205,870 70,875 205,935 70,945 205,1000 70,1005 3430,1790 3380,1795 995,1910 3565,1995 3620,1995 1900,2140 1900,2220 1900,2300
IO1: "Sensor Connector.3" U7.12 | length 1480.6
  Top Layer w7: v1(605,1375) 631.1,1401.1 U7.12@929.53,1401.1
  Bottom Layer w7: 78.74,2183.46 86.54,2183.46 140,2130 210,2130 415,1925 415,1440 480,1375 v1(605,1375)
IO2: "Sensor Connector.5" U7.13 | length 1461.1
  Top Layer w7: v1@610,1320 671.42,1381.42 U7.13@929.53,1381.42
  Bottom Layer w7: 78.74,2083.46 78.74,2071.26 115,2035 235,2035 395,1875 395,1420 495,1320 v1(605,1320)
IO3: "Sensor Connector.7" U7.14 | length 1397.6
  Top Layer w7: v1(605,1260) 706.73,1361.73 U7.14@929.53,1361.73
  Bottom Layer w7: 78.74,1983.46 122.2,1940 200,1940 375,1765 375,1415 530,1260 v1(605,1260)